# Altium PCB BLDC_driver_sensorless.PcbDoc
Units mil, origin at the board's own origin, x right, y up, seen from the top; angles counter-clockwise.
Board outline 3018.75 x 1598.75 mil, 2 copper layers (Top Layer, Bottom Layer); 91 components, 61 nets, 251 pads, 45 vias.
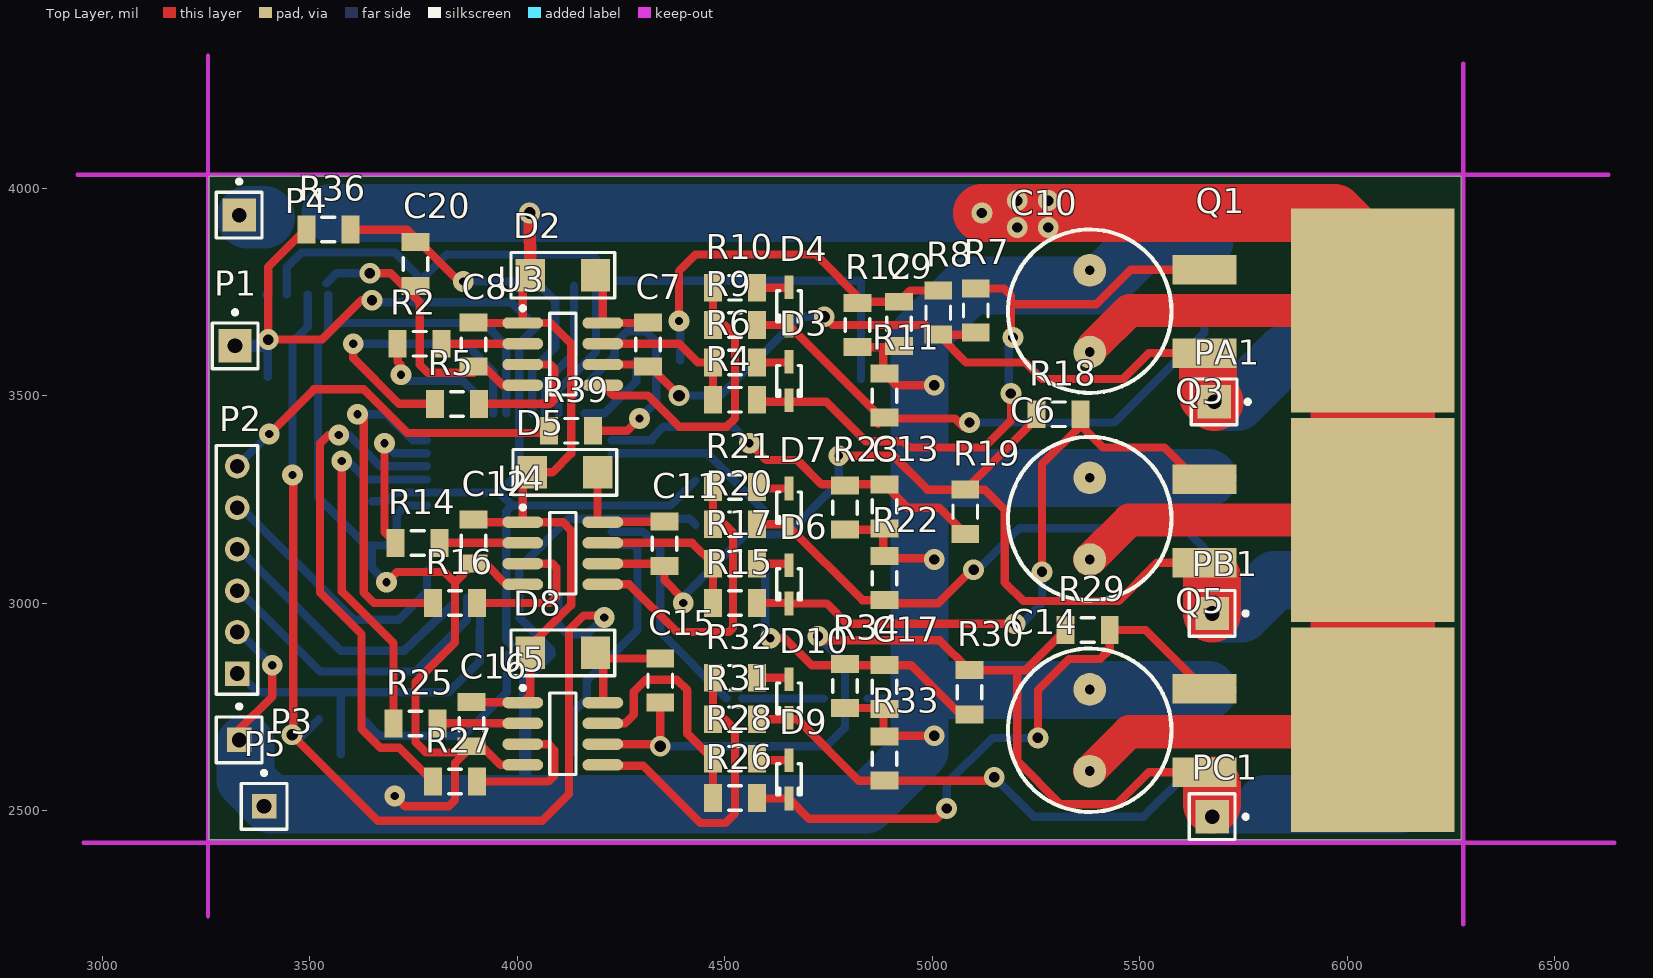
[diagram p0: Top Layer view]
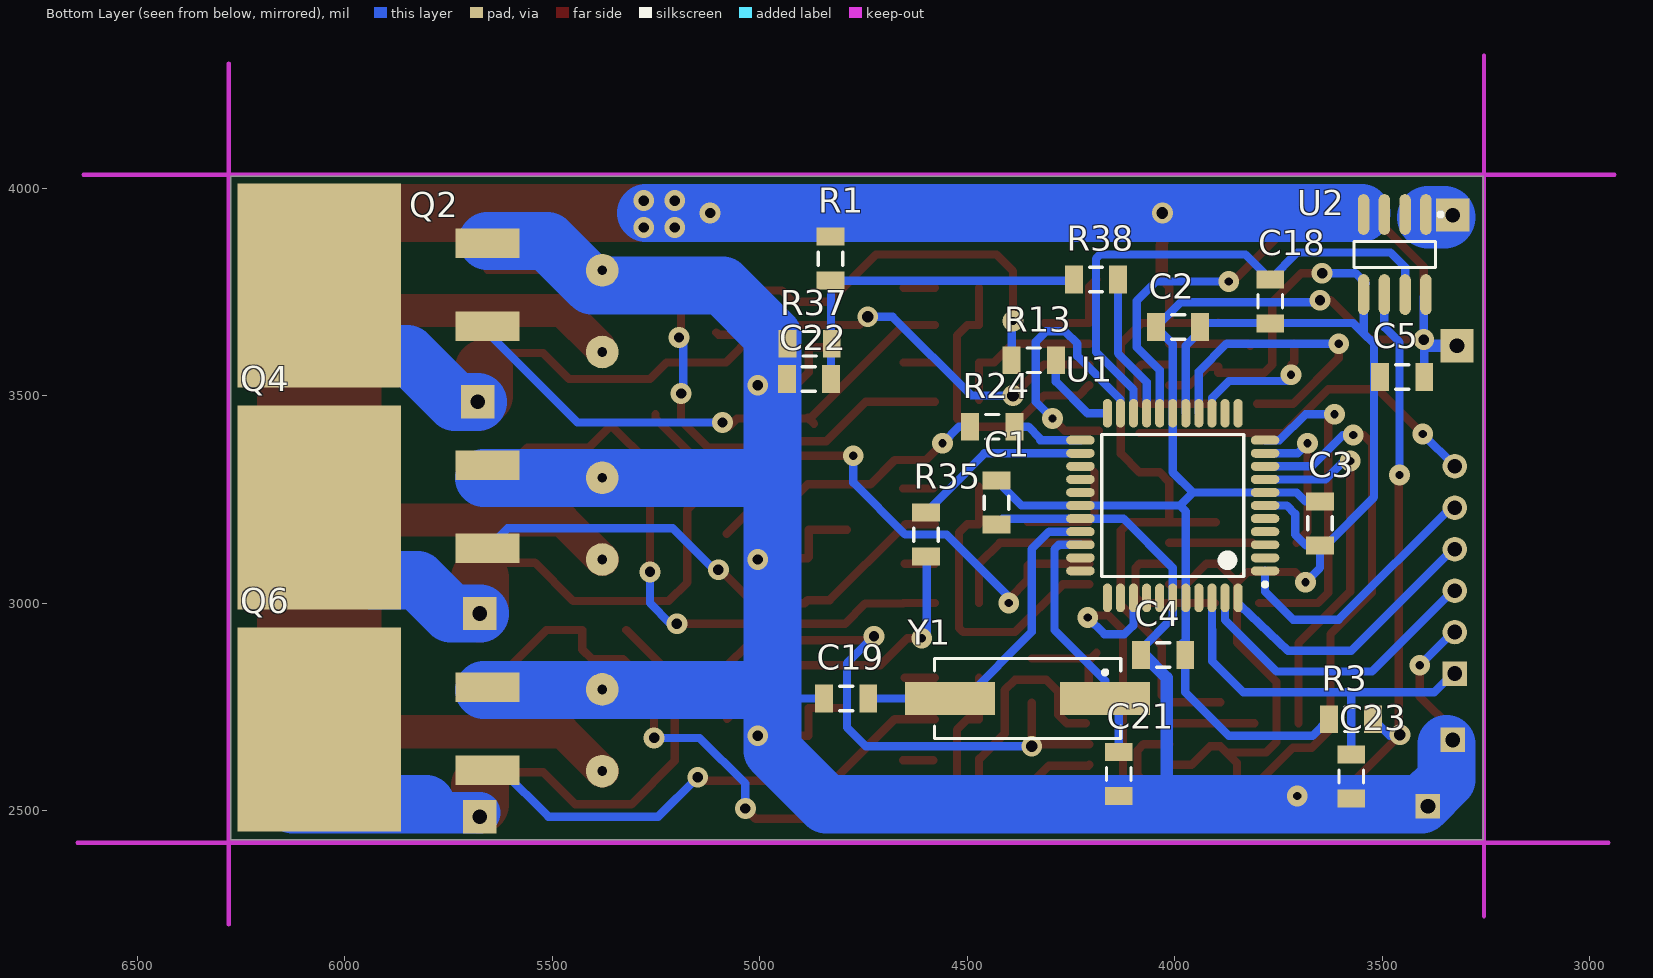
[diagram p1: Bottom Layer view, seen from below]
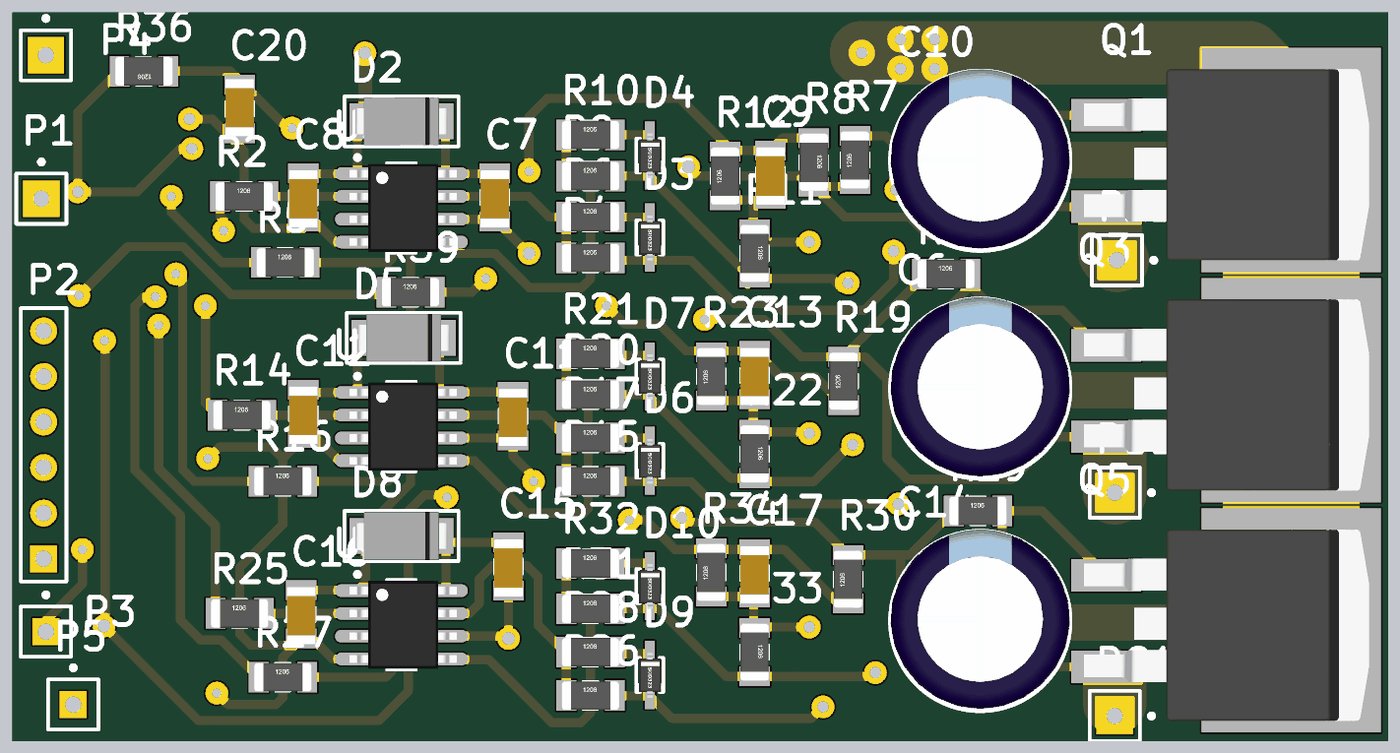
[diagram p2: 3D render of the assembled board from above, using the file's embedded part models]
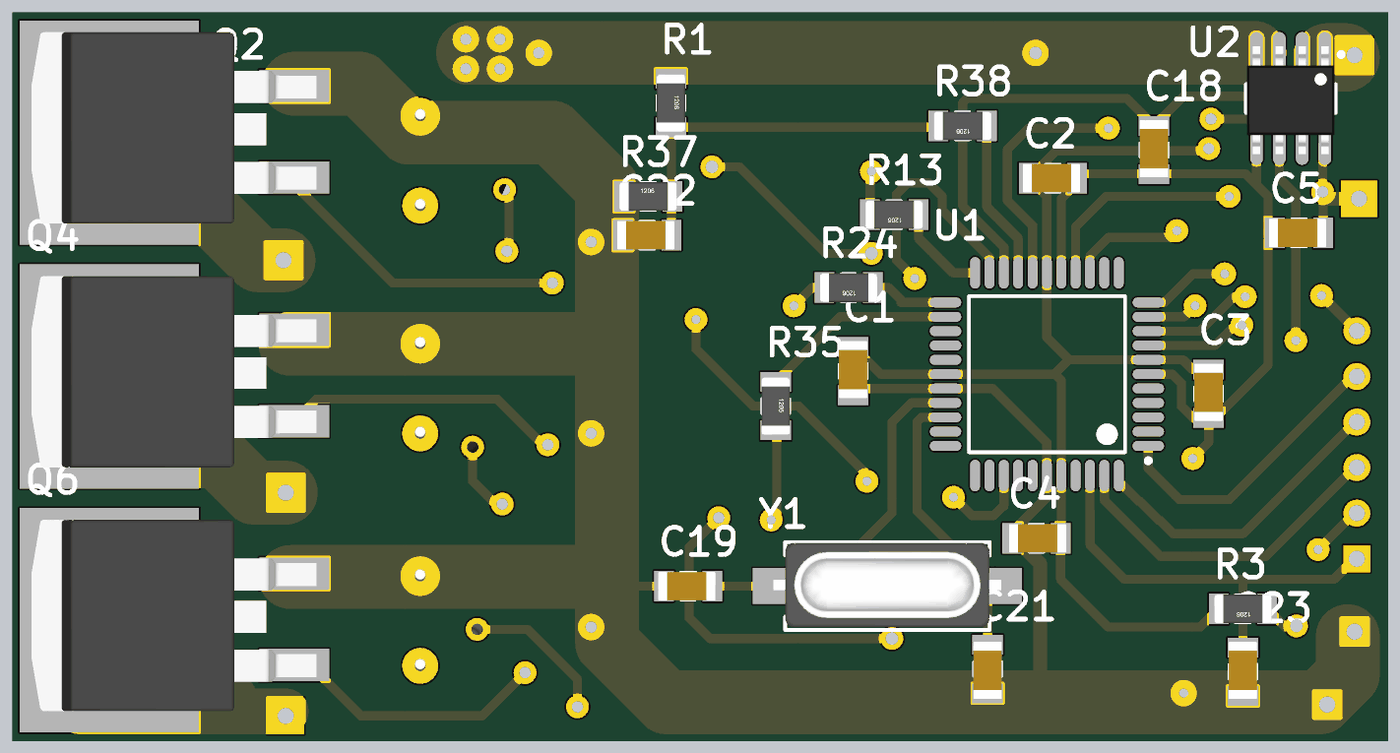
[diagram p3: 3D render of the assembled board from below, using the file's embedded part models]

## Layer stack, top to bottom
Top Solder: solder mask 0.4, Solder Resist, Dk 3.5
Top Layer: signal copper 1.4
Dielectric 1: dielectric 12.6, FR-4, Dk 4.8
Bottom Layer: signal copper 1.4
Bottom Solder: solder mask 0.4, Solder Resist, Dk 3.5

## Board outline
3256.25,2430 3256.25,4028.75 6275,4028.75 6275,2430

## Design rules (kind name [scope] priority, off if disabled: settings)
Clearance [All] p1: gap=15
PolygonConnect [All] p1: connectstyle=Direct reliefconductorwidth=10 reliefentries=4 polygonreliefangle="90 Angle" airgapwidth=10
RoutingVias [All] p1: holewidth=20 width=50 viastyle="Through Hole" minholewidth=20 minwidth=50 maxholewidth=20 maxwidth=50
SolderMaskExpansion [All] p1: expansion=4
Width [All] p1: maxlimit=300 minlimit=20 preferedwidth=30 minimp=50.000000 maximp=50.000000 favimp=50.000000
30 further rules are at their usual default settings.

## Classes and differential pairs
component class BLDC_driver_sensorless_logic: C1 C2 C3 C4 C18 C19 C20 C21 C23 P1 P2 P3 R36 R39 U1 Y1
component class BLDC_driver_sensorless_power: C5 C6 C7 C8 C9 C10 C11 C12 C13 C14 C15 C16 C17 C22 D2 D3 D4 D5 D6 D7 D8 D9 D10 P4 P5 PA1 PB1 PC1 Q1 Q2 Q3 Q4 Q5 Q6 R1 R2 R3 R4 R5 R6 R7 R8 R9 R10 R11 R12 R13 R14 R15 R16 R17 R18 R19 R20 R21 R22 R23 R24 R25 R26 R27 R28 R29 R30 R31 R32 R33 R34 R35 R37 R38 U2 U3 U4 U5

## Components (designator, comment, footprint, x,y, rotation, side; value= is the part's Value field where it differs from the comment)
C1 "Cap SMD" "1206 capacitor" 4430,3240 r90 bottom
C2 "Cap SMD" "1206 capacitor" 3990,3665 r0 bottom
C3 "Cap SMD" "1206 capacitor" 3650,3190 r90 bottom
C4 "Cap SMD" "1206 capacitor" 4030,2875 r180 bottom
C5 "Cap SMD" "1206 capacitor" 3450,3545 r0 bottom
C6 "Cap pol" "Cap elec 10x16-5" 5380,3105 r90 top
C7 "Cap SMD" "1206 capacitor" 4315,3625 r270 top
C8 "Cap SMD" "1206 capacitor" 3895,3625 r270 top
C9 "Cap SMD" "1206 capacitor" 4920,3675 r270 top
C10 "Cap pol" "Cap elec 10x16-5" 5380,3605 r90 top
C11 "Cap SMD" "1206 capacitor" 4355,3145 r270 top
C12 "Cap SMD" "1206 capacitor" 3895,3150 r270 top
C13 "Cap SMD" "1206 capacitor" 4885,3235 r270 top
C14 "Cap pol" "Cap elec 10x16-5" 5380,2595 r90 top
C15 "Cap SMD" "1206 capacitor" 4345,2815 r270 top
C16 "Cap SMD" "1206 capacitor" 3890,2710 r270 top
C17 "Cap SMD" "1206 capacitor" 4885,2800 r270 top
C18 "Cap SMD" "1206 capacitor" 3770,3725 r90 bottom
C19 "Cap SMD" "1206 capacitor" 4790,2770 r0 bottom
C20 "Cap SMD" "1206 capacitor" 3755,3815 r90 top
C21 "Cap SMD" "1206 capacitor" 4135,2590 r270 bottom
C22 "Cap SMD" "1206 capacitor" 4880,3540 r0 bottom
C23 "Cap SMD" "1206 capacitor" 3575,2580 r90 bottom
D2 "Diode ES1G" DO-214AC 4110,3790 r0 top
D3 "1N4148WS" SOD323 4655,3535 r270 top
D4 "1N4148WS" SOD323 4655,3715 r270 top
D5 "Diode ES1G" DO-214AC 4115,3315 r0 top
D6 "1N4148WS" SOD323 4655,3045 r270 top
D7 "1N4148WS" SOD323 4655,3230 r270 top
D8 "Diode ES1G" DO-214AC 4110,2880 r0 top
D9 "1N4148WS" SOD323 4655,2575 r270 top
D10 "1N4148WS" SOD323 4655,2770 r270 top
P1 "Plug" PIN1#1 3320,3620 r0 top
P2 "Header 6" HDR1X6 3325,2830 r90 top
P3 "Plug" PIN1#2 3330,2670 r0 top
P4 "Plug" PIN1#1 3330,3935 r0 top
P5 "Plug" PIN1#2 3390,2510 r0 top
PA1 "Plug" PIN1#1 5680,3485 r270 top
PB1 "Plug" PIN1#1 5675,2975 r270 top
PC1 "Plug" PIN1#1 5675,2485 r270 top
Q1 "STB85NF55T4" TO-263-2 6255,3945 r270 top
Q2 "STB85NF55T4" TO-263-2 6255,3525 r90 bottom
Q3 "STB85NF55T4" TO-263-2 6255,3440 r270 top
Q4 "STB85NF55T4" TO-263-2 6255,2990 r90 bottom
Q5 "STB85NF55T4" TO-263-2 6255,2935 r270 top
Q6 "STB85NF55T4" TO-263-2 6255,2455 r90 bottom
R1 "Res3" "1206 resistor" 4830,3830 r270 bottom
R2 "Res3" "1206 resistor" 3765,3625 r0 top
R3 "Res3" "1206 resistor" 3575,2720 r0 bottom
R4 "Res3" "1206 resistor" 4525,3490 r0 top
R5 "Res3" "1206 resistor" 3855,3480 r0 top
R6 "Res3" "1206 resistor" 4525,3580 r0 top
R7 "Res3" "1206 resistor" 5105,3705 r90 top
R8 "Res3" "1206 resistor" 5015,3700 r270 top
R9 "Res3" "1206 resistor" 4525,3670 r0 top
R10 "Res3" "1206 resistor" 4525,3760 r0 top
R11 "Res3" "1206 resistor" 4885,3500 r270 top
R12 "Res3" "1206 resistor" 4820,3670 r90 top
R13 "Res3" "1206 resistor" 4340,3585 r0 bottom
R14 "Res3" "1206 resistor" 3760,3145 r0 top
R15 "Res3" "1206 resistor" 4525,3000 r0 top
R16 "Res3" "1206 resistor" 3850,3000 r0 top
R17 "Res3" "1206 resistor" 4525,3095 r0 top
R18 "Res3" "1206 resistor" 5305,3455 r0 top
R19 "Res3" "1206 resistor" 5080,3220 r90 top
R20 "Res3" "1206 resistor" 4525,3190 r0 top
R21 "Res3" "1206 resistor" 4525,3280 r0 top
R22 "Res3" "1206 resistor" 4885,3060 r270 top
R23 "Res3" "1206 resistor" 4790,3230 r90 top
R24 "Res3" "1206 resistor" 4440,3425 r0 bottom
R25 "Res3" "1206 resistor" 3755,2710 r0 top
R26 "Res3" "1206 resistor" 4525,2530 r0 top
R27 "Res3" "1206 resistor" 3850,2570 r0 top
R28 "Res3" "1206 resistor" 4525,2625 r0 top
R29 "Res3" "1206 resistor" 5375,2935 r0 top
R30 "Res3" "1206 resistor" 5090,2785 r90 top
R31 "Res3" "1206 resistor" 4525,2720 r0 top
R32 "Res3" "1206 resistor" 4525,2820 r0 top
R33 "Res3" "1206 resistor" 4885,2625 r270 top
R34 "Res3" "1206 resistor" 4790,2800 r90 top
R35 "Res3" "1206 resistor" 4600,3165 r270 bottom
R36 "Res3" "1206 resistor" 3545,3900 r180 top
R37 "Res3" "1206 resistor" 4880,3625 r180 bottom
R38 "Res3" "1206 resistor" 4190,3780 r0 bottom
R39 "Res3" "1206 resistor" 4130,3415 r0 top
U1 "DSPIC30F3011-30I/PT" TQFP-PT44_N 4005,3235 r0 bottom
U2 "ACS711" SOIC8 3470,3840 r270 bottom
U3 "FAN7382M" SOIC8 4110,3600 r0 top
U4 "FAN7382M" SOIC8 4110,3120 r0 top
U5 "FAN7382M" SOIC8 4110,2685 r0 top
Y1 "XTAL" HC49/US 4360,2770 r0 bottom

## Footprints (in the part's own frame and the unit in brackets; to place one, negate y for a bottom-side part, rotate by r counter-clockwise, add the part's x,y. Pads: shape width x height; smd on the part's side, far side on the other; paste and mask are expansions set on the pad)
"1206 capacitor" [mm]
  rect 1.1x1.7 smd: 1(-1.299,0) 2(1.401,0)
  silkscreen extent -0.35,-0.75 0.45,0.75, body extent -1.47,-0.8 1.73,0.8, height 1
"1206 resistor" [mm]
  rect 1.1x1.7 smd: 1(-1.35,0) 2(1.35,0)
  silkscreen extent -0.4,-0.75 0.4,0.75, body extent -1.6,-0.8 1.6,0.8, height 1
"Cap elec 10x16-5" [mm]
  round 2 hole 0.6: 1(0,0) 2(5,0)
  silkscreen extent -2.5,-5 7.5,5, body extent -2.4,-4.99 7.6,4.99, height 16.5
DO-214AC [mm]
  rect 1.8x2 smd: A(-2,0) K(2,0)
  silkscreen extent -3.17,-1.4 3.17,1.4, body extent -2.55,-1.33 2.55,1.33, height 2.17
HC49/US [mm] "Crystal oscillator smd"
  rect 5.5x2 smd: 1(-4.877,0) 2(4.623,0)
  silkscreen extent -5.83,-2.45 5.57,2.45, body extent -6.48,-2.41 6.22,2.29, height 4.2
HDR1X6 [mm] "Connector; Header; 6 Position"
  rect 1.5x1.5 hole 0.9: 1(0,0)
  round 1.5 hole 0.9: 2(2.54,0) 3(5.08,0) 4(7.62,0) 5(10.16,0) 6(12.7,0)
  silkscreen extent -1.27,-1.27 13.97,1.27
PIN1#1 [mil] "Connector; Plug"
  rect 80x80 hole 35.43: 1(0,0)
  silkscreen extent -55,-55 55,86
PIN1#2 [mil] "Connector; Plug"
  rect 59.06x59.06 hole 35.43: 1(0,0)
  silkscreen extent -55,-55 55,86
SOD323 [mm]
  rect 1.45x0.55 smd: 1(1.175,0) 2(-1.175,0)
  silkscreen extent -0.95,-0.75 0.95,0.75, body extent -1.22,-0.61 1.28,0.64, height 1
SOIC8 [mm]
  oval 2.5x0.7 smd: 1(-2.45,1.905) 2(-2.45,0.635) 3(-2.45,-0.635) 4(-2.45,-1.905) 5(2.45,-1.905) 6(2.45,-0.635) 7(2.45,0.635) 8(2.45,1.905)
  silkscreen extent -2.57,-2.5 0.8,2.93, body extent -2.9,-2.45 3.1,2.45, height 1.75
TO-263-2 [mm] "D2PAK, 2 leads"
  rect 1.8x3.9 smd: 1(3.6,-15.2) 3(8.7,-15.2)
  rect 12.5x10 smd: tab(6.1,-4.9)
  body extent 1.03,-16.44 11.7,-0.56, height 4.83
TQFP-PT44_N [mm] "Thin QFP, 44-Leads, Body 10x10mm, Pitch 0.8mm, IPC Medium Density"
  oval 1.75x0.55 smd: 1(-5.65,4) 2(-5.65,3.2) 3(-5.65,2.4) 4(-5.65,1.6) 5(-5.65,0.8) 6(-5.65,0) 7(-5.65,-0.8) 8(-5.65,-1.6) 9(-5.65,-2.4) 10(-5.65,-3.2) 11(-5.65,-4) 23(5.65,-4) 24(5.65,-3.2) 25(5.65,-2.4) 26(5.65,-1.6) 27(5.65,-0.8) 28(5.65,0) 29(5.65,0.8) 30(5.65,1.6) 31(5.65,2.4) 32(5.65,3.2) 33(5.65,4)
  oval 0.55x1.75 smd: 12(-4,-5.65) 13(-3.2,-5.65) 14(-2.4,-5.65) 15(-1.6,-5.65) 16(-0.8,-5.65) 17(0,-5.65) 18(0.8,-5.65) 19(1.6,-5.65) 20(2.4,-5.65) 21(3.2,-5.65) 22(4,-5.65) 34(4,5.65) 35(3.2,5.65) 36(2.4,5.65) 37(1.6,5.65) 38(0.8,5.65) 39(0,5.65) 40(-0.8,5.65) 41(-1.6,5.65) 42(-2.4,5.65) 43(-3.2,5.65) 44(-4,5.65)
  silkscreen extent -5.77,-4.35 4.35,4.95, body extent -5,-5 5,5, height 1.2

## Part data
C1 C2 C3 C4 C5 C7 C8 C9 C11 C12 C13 C15 C16 C17 C18 C19 C20 C21 C22 C23: "SMD capacitor"
C6 C10 C14: "Capa pol through hole"
D2 D5 D8: "1.0A SURFACE MOUNT SUPER-FAST RECTIFIER"
D3 D4 D6 D7 D9 D10: "Diode commutation"
P2: "Header, 6-Pin"
Q1 Q2 Q3 Q4 Q5 Q6: "MOSFET Canal-N, 80A 55V"
R1 R2 R3 R4 R5 R6 R7 R8 R9 R10 R11 R12 R13 R14 R15 R16 R17 R18 R19 R20 R21 R22 R23 R24 R25 R26 R27 R28 R29 R30 R31 R32 R33 R34 R35 R36 R37 R38 R39: "Resistor"
U1: "High-Performance 16-bit Digital Signal Controller, 24 KB Flash, 1 KB SRAM, 1 KB EEPROM, 44-Pin TQFP, Industrial Temperature"
U2: "+/-12A HALL EFFECT CURRENT SENSOR"
U3 U4 U5: "High and Low Side Gate Driver"
Y1: "Crystal Oscillator"

## Via types
v1: diameter 50, hole 25, Top Layer to Bottom Layer, 21 vias
v2: diameter 50, hole 20, Top Layer to Bottom Layer, 19 vias
v3: diameter 50, hole 28, Top Layer to Bottom Layer, 5 vias

## Nets (pads, with @x,y where several pads share a name; then routed paths per layer and width w, separated by ;. In a path a pad name is that pad's centre, name@x,y a point inside that pad or via, vN(x,y) a via of type N, cw(c..) or ccw(c..) an arc to the next point about the centre after c; other vN are vias at no path point)
COMPWM: C23.2 P2.1 U1.42 | length 938.7
  Bottom Layer w20: P2.1@3325,2835 3375,2785 3575,2785 ; C23.2 3574.99,2784.99 ; 3910,2935 3910,2860 3834.99,2784.99 3574.99,2784.99 ; 3910.51,2935.51 U1.42
CURRENT: C18.2 U1.20 U2.7 | length 1291.8
  Bottom Layer w20: U2.7 3445,3810 3480,3845 3705,3845 3769.85,3780.15 C18.2 3829.84,3840 4180,3840 4190,3830 4190,3605 4099.49,3514.49 U1.20
FAULT: R3.1 U1.36 U2.6 | length 2632.3
  Top Layer w20: v2(3458.75,3308.75) 3460,3307.5 3460,2685 v3(3457.5,2682.5) 3665,2475 4060,2475 4125,2540 4125,2935 4160,2970 v2@4205,2970
  Bottom Layer w20: v3(3457.5,2682.5) 3460,2680 3481.85,2680 R3.1 ; v2(3458.75,3308.75) 3458.75,3500.93 3458.5,3501.19 3458.5,3588.83 3458.75,3589.08 3458.75,3628.75 3495,3665 U2.6 ; U1.36 4099.49,2945.51 4101.1,2945.51 4121.62,2925 4170,2925 v2(4210,2965)
GND: C1.1 C2.1 C3.1 C4.1 C5.2 C6.2 C8.2 C9.2 C10.2 C12.2 C13.2 C14.2 C16.2 C17.2 C18.1 C19.2 C20.1 C21.2 C22.2 C23.1 P2.2 P3.1 P5.1 Q2.3 Q4.3 Q6.3 R11.1 R12.1 R22.1 R23.1 R33.1 R34.1 R37.1 U1.6 U1.16 U1.29 U1.39 U2.5 U3.4 U4.4 U5.4 | length 10924.8
  Top Layer w20: P3.1@3330,2680 3330,2695 3410,2775 v2(3410,2850) ; v1(3645,3795) 3695,3795 3765,3725 3765,3575 3785.01,3554.99 3894.99,3554.99 C8.2 3920.15,3569.85 3965,3525 U3.4 ; v2(3685,3050) 3710,3075 3824.86,3075 3850,3049.86 ; v2(3705,2535) 3730,2510 3835,2510 3850,2525 3850,2614.86 C16.2 3915.15,2654.85 3960,2610 U5.4 ; C16.2@3875,2640 3780,2640 3755,2665 3755,2810 3850,2905 3850,3049.86 ; U4.4 3973.27,3045 3923.42,3094.85 C12.2 3850,3049.86 ; R34.1 4882.99,2746.85 4882.99,2680.16 4954.84,2680.16 4955,2680 v1(5005,2680) ; R23.1 4882,3176.85 R22.1@4882,3116.15 ; R12.1 4882,3616.85 R11.1@4882,3556.15 ; R22.1 R22.1@4882,3116.15 ; R11.1 4913.15,3525 v1(5005,3525) ; v1@5005,3108.15 4885,3108.15 4882,3111.15 R22.1@4882,3116.15
  Bottom Layer w20: P2.2@3325,2935 v2(3410,2850) ; U2.5@3540,3770 3565,3795 v1(3645,3795) ; U2.5 3545,3650 ; v2(3685,3050) 3649.99,3085.01 C3.1 ; U1.6 3730,3235 3710,3215 3710,3165 3683.85,3138.85 C3.1 ; C2.1 3938.85,3655.01 3973.5,3620.35 U1.16 ; C2.1@3938.85,3675 3570,3675 3545,3650 ; C4.1@4080.58,2889.42 4005,2965 U1.39 4005,3085 4123.5,3203.5 U1.29 4415.34,3203.5 C1.1 ; C19.2 4969.99,2770.01 ; 3545,3650 3520,3625 3520,3545 3520,3255 3636.15,3138.85 C3.1
  Bottom Layer w30: 4020,2548.61 4020,2820 C4.1@4078.07,2878.07
  Bottom Layer w140: P3.1@3345,2660 3345,2575 3405,2515 4840,2515 4970,2645 4970,3645 5090,3765 5405,3765 5512.52,3872.52 Q2.3@5656.57,3872.52 ; 5005,2790 Q6.3@5665,2790 ; 5006.85,3301.85 C6.2 Q4.3@5665,3301.85
  other v1: 5005,3105
HIN1: R2.1 U1.14 | length 337.7
  Top Layer w20: R2.1 3711.85,3581.3 3720,3573.15 v2(3720,3550)
  Bottom Layer w20: v2(3720,3550) 3720,3535 3870,3535 3910.51,3494.49 U1.14
HIN2: R14.1 U1.10 | length 363.6
  Top Layer w20: v2(3680,3385) 3680,3171.85 R14.1
  Bottom Layer w20: v2(3680,3385) 3704.02,3360.98 U1.10
HIN3: R25.1 U1.8 | length 907.5
  Top Layer w20: v2(3577.5,3342.5) 3577.5,3027.5 3701.85,2903.15 R25.1
  Bottom Layer w20: v2(3577.5,3342.5) 3592.5,3342.5 3637.01,3297.99 U1.8
LIN1: R5.1 U1.15 | length 742.7
  Top Layer w20: v2(3605,3625) 3605,3590 3715,3480 R5.1
  Bottom Layer w20: v2(3605,3625) 3875,3625 3942.01,3557.99 U1.15
LIN2: R16.1 U1.11 | length 812.7
  Top Layer w20: v2(3615,3455) 3625,3455 3630,3450 3630,3025 3655,3000 R16.1
  Bottom Layer w20: v2(3615,3455) 3685,3455 3747.52,3392.48 U1.11
LIN3: R27.1 U1.9 | length 1251.4
  Top Layer w20: v2(3570,3405) 3545,3405 3525,3385 3525,3025 3625,2925 3625,2696.38 3669.84,2651.54 3715.32,2651.54 R27.1
  Bottom Layer w20: v2(3570,3405) 3595,3405 3670.51,3329.49 U1.9
MCLR: C20.2 R36.1 U1.18 | length 858.5
  Top Layer w20: R36.1 3735,3900 3860,3775 v2(3870,3775)
  Bottom Layer w20: v2(3870,3775) 4045,3775 4091.8,3728.2 4091.8,3616.8 4036.5,3561.5 U1.18
NetC7_1: C7.1 D2.K U3.8 | length 220.9
  Top Layer w20: D2.K@4188.74,3780 4206.46,3762.28 U3.8 C7.1@4314.99,3675
NetC7_2: C7.2 PA1.1 Q1.3 Q2.tab R7.1 R8.2 U3.6 | length 2109.2
  Top Layer w20: U3.6 4315,3575 v3(4390,3500) ; v3(4740,3690) 4760,3670 4985,3670 ; R7.1 5100,3646.85 R8.2 5081.85,3580 5225,3580 5265,3540 5460,3540 5522.48,3602.48 Q1.3
  Top Layer w140: 5665,3565 5665,3500 PA1.1
  Bottom Layer w20: v3(4390,3500) 4490,3500 4680,3690 v3(4740,3690)
  Bottom Layer w140: PA1.1 5735,3485 5850,3600 Q2.tab@5955,3600
NetC9_1: C9.1 R8.1 R12.2 R13.2 | length 916.2
  Top Layer w20: v2(4390,3680) 4390,3800 4430,3840 4720,3840 4833.85,3726.15 C9.1 4947,3753.15 R8.1
  Bottom Layer w20: v2(4390,3680) 4390,3676.3 4393.15,3673.15 R13.2
NetC11_1: C11.1 D5.K U4.8 | length 254.7
  Top Layer w20: U4.8@4193.74,3207.72 D5.K ; U4.8@4207.6,3196.15 C11.1
NetC11_2: C11.2 PB1.1 Q3.3 Q4.tab R18.1 R19.2 U4.6 | length 2930.2
  Top Layer w20: U4.6 C11.2@4349.84,3095 ; C11.2 4354.99,3055.01 4400,3010 v2(4400,3000) ; v2(4775,3355) 4906.62,3355 4988.47,3273.15 R19.2 ; R18.1 5251.85,3445 R19.2 ; Q3.3@5592.52,3112.48 Q3.3@5656.57,3112.48 ; Q3.3 5542.48,3097.48 5450,3005 5220,3005 5175,3050 5175,3225 5126.85,3273.15 R19.2
  Top Layer w80: 5675,3060 Q3.3@5675,3079.06
  Top Layer w140: PB1.1 5675,3060
  Bottom Layer w20: v2(4400,3000) 4400,3015 4550,3165 4650,3165 4775,3290 v2(4775,3355)
  Bottom Layer w140: PB1.1 5745,2975 5825,3055 5935,3055 6062.09,3182.09 Q4.tab
NetC13_1: C13.1 R19.1 R23.2 R24.2 | length 693.8
  Top Layer w20: v2(4560,3385) 4600,3345 4675,3345 4733.85,3286.15 C13.1 4941.14,3230 5016.85,3230 R19.1
  Bottom Layer w20: R24.2 4520,3425 v2(4560,3385)
NetC15_1: C15.1 D8.K U5.8 | length 269.1
  Top Layer w20: D8.K D8.K@4202.59,2866.15 ; U5.8@4207.6,2761.15 4207.6,2861.14 D8.K@4202.59,2866.15 ; C15.1 D8.K@4202.59,2866.15
NetC15_2: C15.2 PC1.1 Q5.3 Q6.tab R29.1 R30.2 U5.6 | length 2849.3
  Top Layer w20: U5.6 4335,2660 4344.99,2669.99 C15.2 ; v1(4725,2920) 4735,2910 5018.15,2910 R30.2 5205,2838.15 ; R29.1 5225,2838.15 5205,2838.15 ; Q5.3 5522.48,2592.48 5445,2515 5310,2515 5205,2620 5205,2838.15
  Top Layer w140: PC1.1@5675,2515 Q5.3@5675,2560
  Bottom Layer w20: v3(4345,2655) 4745,2655 4790,2700 4790,2855 v1(4725,2920)
  Bottom Layer w100: PC1.1@5675,2495 5800,2495
  Bottom Layer w140: 5805,2515 Q6.tab@6125,2515
NetC17_1: C17.1 R30.1 R34.2 R35.2 | length 744.1
  Top Layer w20: v2(4610,2915) 4645,2915 4710,2850 4950,2850 R30.1@5079.07,2720.93
  Bottom Layer w20: R35.2@4597.58,3097.42 4597.58,2927.42 v2(4610,2915) v2@4605,2910
NetC22_1: C22.1 R1.2 R37.2 R38.2 | length 822.5
  Bottom Layer w20: R38.2@4243.15,3776.85 R1.2 ; C22.1 R1.2@4828.85,3775.7
NetD3_1: D3.1 Q1.1 R4.2 R7.2 | length 1597
  Top Layer w20: R4.2@4578.15,3485 4745,3485 4840,3390 4930,3390 4945,3375 5125,3375 5190,3440 v1@5190,3490 ; R7.2 5173.15,3758.15 5190,3741.3 5190,3720 ; v1@5190,3640 5190,3720 ; Q1.1 5478.27,3803.27 5395,3720 5190,3720
  Bottom Layer w20: v1(5190,3505) 5195,3505 5185,3515 5185,3650 v1(5195,3640)
NetD3_2: D3.2 R6.2 | length 75.6
  Top Layer w20: R6.2 D3.2@4653.74,3580
NetD4_1: D4.1 Q2.1 R9.2 R11.2 | length 1294.7
  Top Layer w20: R9.2 4653.74,3670 D4.1 4876.89,3446.85 R11.2 ; R11.2@4869.58,3432.27 4882.31,3445 5055,3445 v1@5075,3425
  Bottom Layer w20: v1(5090,3435) 5440,3435 5656.57,3651.57 Q2.1@5656.57,3671.73
NetD4_2: D4.2 R10.2 | length 75.6
  Top Layer w20: R10.2 D4.2@4653.74,3760
NetD6_1: D6.1 Q3.1 R15.2 R18.2 | length 1545.7
  Top Layer w20: R15.2 D6.1@4653.74,3000 ; D6.1 4746.26,2998.74 4795,2950 v1(5200,2950) ; v1(5265,3075) 5265,3335 5358.43,3428.43 5411.85,3375 5560,3375 5636.73,3298.27 Q3.1
  Bottom Layer w20: v1(5200,2950) 5215,2950 5265,3000 v1(5265,3075)
NetD6_2: D6.2 R17.2 | length 73.1
  Top Layer w20: R17.2 D6.2@4651.26,3095
NetD7_1: D7.1 Q4.1 R20.2 R22.2 | length 1216
  Top Layer w20: R20.2 4648.74,3190 D7.1 4831.89,3006.85 R22.2 4892.44,2999.41 5014.41,2999.41 5080,3065
  Bottom Layer w20: v1@5110,3080 5210,3180 5608.31,3180 Q4.1
  other v1: 5100,3080
NetD7_2: D7.2 R21.2 | length 73.1
  Top Layer w20: R21.2@4581.89,3276.26 D7.2
NetD9_1: D9.1 Q5.1 R26.2 R29.2 | length 1476.3
  Top Layer w20: R26.2 4579.41,2528.74 D9.1 4703.74,2480 5010,2480 v1(5035,2505) ; v1(5255,2675) 5255,2790 5330,2865 5405,2865 5428.15,2888.15 R29.2 5514.84,2935 Q5.1
  Bottom Layer w20: v1(5035,2505) 5035,2565 5145,2675 v1(5255,2675)
NetD9_2: D9.2 R28.2 | length 73.1
  Top Layer w20: R28.2@4581.89,2621.26 D9.2
NetD10_1: D10.1 Q6.1 R31.2 R33.2 | length 1220.4
  Top Layer w20: R31.2 4675,2720 4823.15,2571.85 R33.2 v1@5145,2571.85
  Bottom Layer w20: v1(5150,2580) 5245,2485 5510,2485 5621.73,2596.73 Q6.1
NetD10_2: D10.2 R32.2 | length 73.1
  Top Layer w20: R32.2 D10.2@4651.26,2820
NetR2_2: R2.2 U3.2 | length 197.5
  Top Layer w20: R2.2@3818.15,3620 3823.15,3625 U3.2
NetR4_1: R4.1 R6.1 U3.7 | length 374
  Top Layer w20: U3.7 4390.32,3625 4435.32,3580 R6.1 R4.1
NetR5_2: R5.2 U3.3 | length 341.6
  Top Layer w20: R5.2 4080,3480 4090,3490 4090,3565 4080,3575 U3.3
NetR9_1: R9.1 R10.1 U3.5 | length 721.8
  Top Layer w20: U3.5 4231.46,3500 4315,3500 4390,3425 4505,3425 4525,3445 4525,3645 4500,3670 R9.1 R10.1
NetR14_2: R14.2 U4.2 | length 200.4
  Top Layer w20: R14.2 U4.2
NetR15_1: R15.1 R17.1 U4.7 | length 381.1
  Top Layer w20: U4.7 4421.85,3145 R17.1 R15.1
NetR16_2: R16.2 U4.3 | length 353.7
  Top Layer w20: R16.2 4080,3000 4095,3015 4095,3085 4085,3095 U4.3
NetR20_1: R20.1 R21.1 U4.5 | length 741.8
  Top Layer w20: U4.5 4270,3045 4385,2930 4510,2930 4520,2940 4520,3170 4500,3190 R20.1 R21.1
NetR25_2: R25.2 U5.2 | length 205.4
  Top Layer w20: R25.2 U5.2
NetR26_1: R26.1 R28.1 U5.7 | length 568
  Top Layer w20: U5.7@4215,2710 4260,2710 4280.67,2730.67 4280.67,2786 4309.67,2815 4385,2815 4410,2790 4410,2685 4470,2625 R28.1 R26.1
NetR27_2: R27.2 U5.3 | length 335.7
  Top Layer w20: R27.2 4075,2570 4090,2585 4090,2645 4075,2660 U5.3
NetR31_1: R31.1 R32.1 U5.5 | length 751.8
  Top Layer w20: U5.5 4208.26,2608.2 4303.18,2608.2 4441.38,2470 4502.32,2470 4525,2492.68 4525,2695 4500,2720 R31.1 R32.1
OSC1: C19.1 U1.30 Y1.2 | length 758.1
  Bottom Layer w20: U1.30 4302.99,3172.01 4345,3130 4345,2930 Y1.2@4505,2770 ; Y1.2 C19.1
OSC2: C21.1 U1.31 Y1.1 | length 620
  Bottom Layer w20: C21.1 4135.01,2737.01 Y1.1 4167.99,2812.99 4290,2935 4290,3130 4279.49,3140.51 U1.31
PGC/SDI: P2.5 U1.1 | length 647.9
  Bottom Layer w20: P2.5@3327.5,3237.5 3605,2960 3715,2960 3782.56,3027.56 U1.1
PGD/SDO: P2.4 U1.44 | length 663.2
  Bottom Layer w20: P2.4@3325,3135 3575,2885 3727.41,2885 U1.44@3841.35,2993.32
RX: U1.3
S\S\: P2.6 R39.1 | length 880.1
  Top Layer w20: v2(3402.5,3407.5) 3510,3515 3630.5,3515 3735.5,3410 R39.1@4085,3410
  Bottom Layer w20: P2.6 v2(3402.5,3407.5)
S\S\U: R39.2 U1.21 | length 659.3
  Top Layer w20: R39.2 4265,3415 v2(4295,3445)
  Bottom Layer w20: U1.21 4130.98,3490.98 4235,3595 4235,3625 4265,3655 4310,3655 4335,3630 4335,3485 v2(4295,3445)
SCK: P2.3 U1.43 | length 741.8
  Bottom Layer w20: P2.3@3325,3035 3525,2835 3755,2835 3879.02,2959.02 U1.43
TX: U1.2
VA: R13.1 U1.22 | length 207.3
  Bottom Layer w20: U1.22 4210.59,3457.44 4286.85,3533.7 R13.1
VB: R24.1 U1.23 | length 171.6
  Bottom Layer w20: U1.23 4325,3392.48 ; 4324.61,3396.55 4353.06,3425 R24.1
VBAT: P4.1 U2.1 U2.2 | length 40
  Bottom Layer w150: P4.1@3350,3930 U2.1@3390,3930
VBATSENS: C6.1 C8.1 C10.1 C12.1 C14.1 C16.1 D2.A D5.A D8.A Q1.tab Q3.tab Q5.tab R1.1 U2.3 U2.4 U3.1 U4.1 U5.1 | length 7446.4
  Top Layer w20: C16.1 4014.69,2761.15 4031.26,2777.72 D8.A 4031.26,2896.26 4130,2995 4130,3175 4110,3195 U4.1 ; C8.1 3896.14,3675 U3.1 ; C12.1@3901.14,3195 U4.1 ; D2.A@4031.26,3780 4013.54,3762.28 U3.1 ; U4.1 4013.54,3292.28 D5.A 4085,3315 4130,3360 4130,3625 4080,3675 U3.1
  Top Layer w30: v3(4030,3940) D2.A D2.A@4031.26,3780
  Top Layer w80: C14.1 5475,2690 Q5.tab@5885,2690 ; C6.1 5474.84,3199.84 Q3.tab ; C10.1@5387.5,3617.5 5475,3705 Q1.tab@5975,3705
  Top Layer w140: v1(5120,3940) 5970,3940 Q1.tab@6050,3860
  Top Layer w300: Q5.tab Q3.tab Q1.tab
  Bottom Layer w140: U2.4@3550,3940 5275,3940
  other v1: 5205,3905 5280,3905 5205,3970 5280,3970
VBUS: R38.1 U1.19 | length 336.1
  Bottom Layer w20: U1.19 4067.99,3532.99 4136.85,3601.85 R38.1@4136.85,3765
VC: R35.1 U1.24 | length 432.8
  Bottom Layer w20: U1.24 4459.02,3360.98 4505,3315 4505,3313.15 R35.1
VDD: C1.2 C2.2 C3.2 C4.2 C5.1 P1.1 R3.2 R36.2 U1.7 U1.17 U1.28 U1.40 U2.8 | length 3382.5
  Top Layer w20: R36.2 3490,3900 3400,3810 v1(3400,3635) 3530,3635 3625,3730 v1(3650,3730)
  Bottom Layer w20: U2.8 3400,3738.54 v1(3400,3635) ; C5.1 v1@3398.85,3633.85 ; R3.2 3668.15,2680 3870,2680 3974.85,2784.85 C4.2 ; C3.2 3685.15,3245.15 3706.5,3266.5 U1.7 3956.5,3266.5 ; v1@3650,3725 3985.16,3725 C2.2 4005,3624.86 U1.17 4005,3414.65 4005,3315 3956.5,3266.5 ; C4.2@3984.85,2899.99 3973.5,2911.34 U1.40 3973.5,3220.51 3987.99,3235 ; C1.2 4369.84,3235 U1.28 3987.99,3235 ; 3956.5,3266.5 3987.99,3235
  Bottom Layer w30: P1.1 v1@3385,3620
pads on no net: U1.4 U1.5 U1.12 U1.13 U1.25 U1.26 U1.27 U1.32 U1.33 U1.34 U1.35 U1.37 U1.38 U1.41

## Keep-outs
Keep-Out Layer:
  lines w10: 2940,4032.19 6630,4032.19 ; 2955,2422.19 6645,2422.19 ; 3255,2245 3255,4320 ; 6280,2225 6280,4300 ; 3255,2425 6280,2425 6280,4032.19 3255,4032.19 3255,2425

## Dimensions
6280,4032.19 to 3255,4032.19 on Mechanical 1
6280,2425 to 6280,4032.19 on Mechanical 1